# Allegro board PRISON_GOD_SCH_V221_EP_VIAS_CHANGE.brd
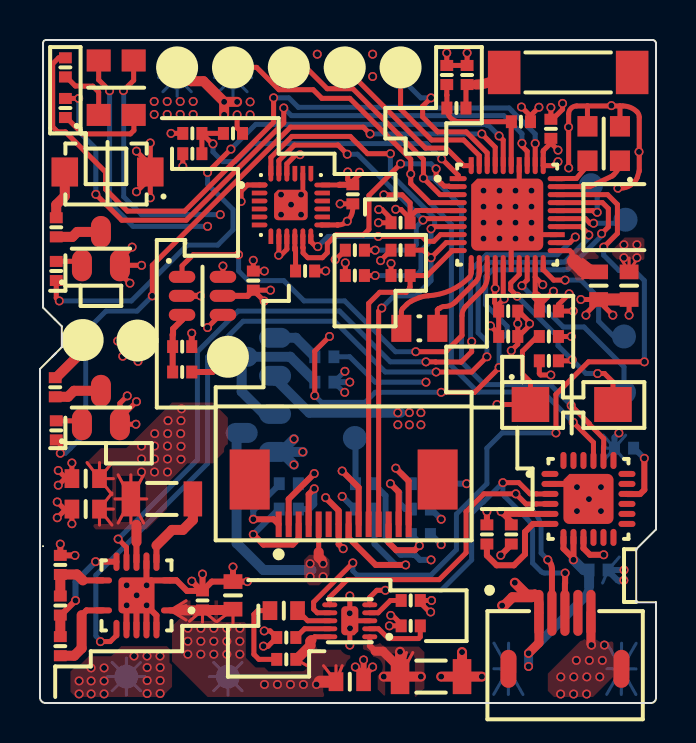
[diagram p0: board, top side]
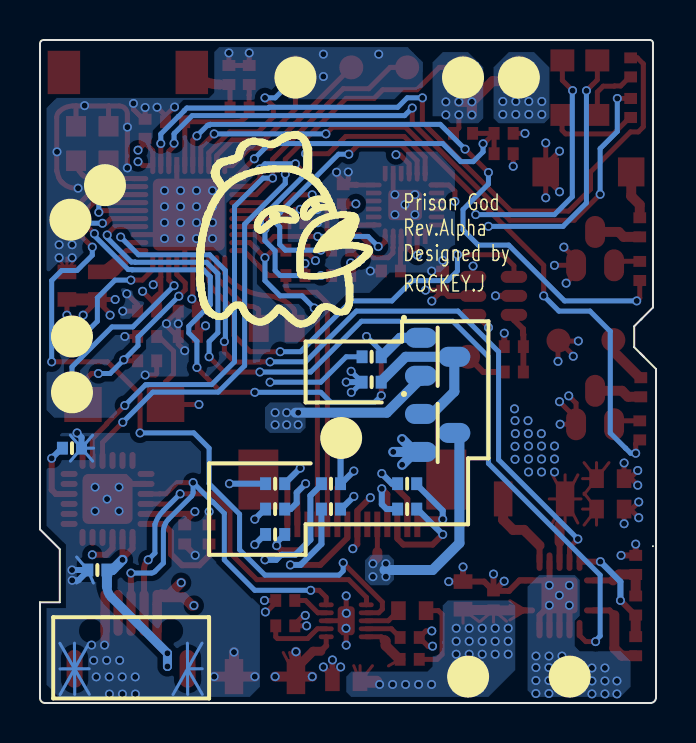
[diagram p1: board, bottom side, seen from below]

Outline 30.81 x 33.17 mm; copper layers: TOP, POWER SOURCE, GND, BOTTOM. Coordinates in mm from the lower left corner of the outline.
Outline path: 0.76,19.18 0.15,19.79 0.15,33.02 arc(0.2,33.13) 0.3,33.17 30.63,33.17 arc(30.76,33.12) 30.81,32.99 30.81,8.69 29.82,7.7 29.82,5.04 30.81,5.04 30.81,0.25 arc(30.74,0.07) 30.56,0 0.28,0 arc(0.08,0.08) 0,0.28 0,16.71 0.79,17.5 ; 0.71,19.23 1.09,18.85 1.09,17.81 0.61,17.32

## Design rules (mm)
constraint set DEFAULT: min track width 0.152

## Placement (name value [footprint] x y rotation side)
ANT  ANTENNA  [ANT700X200-2N]  26.42 31.55 0 top
BAT+  BAT+  [TESTPOINT120]  9.4 1.32 180 bottom
BAT-  BAT-  [TESTPOINT120]  4.32 1.32 180 bottom
C1  100n  [RESC_0402]  7.62 28.5 0 top
C2  2.2p  [RESC_0402]  20.83 29.77 180 top
C3  100n  [RESC_0402]  25.55 28.73 90 top
C4  1.0u  [RESC_0603]  29.46 20.88 90 top
C5  1.0u  [RESC_0402]  25.45 19.61 180 top
C6  100n  [RESC_0402]  25.45 18.34 0 top
C7  1.0u  [RESC_0402]  23.42 19.61 0 top
C8  100n  [RESC_0402]  23.42 18.34 0 top
C9  100n  [RESC_0402]  18.03 24.03 180 top
C10  0-75p  [RESC_0402]  7.11 17.83 0 top
C11  100n  [RESC_0402]  10.67 21.13 270 top
C12  1u  [RESC_0402]  12.45 10.97 180 bottom
C13  4.7u  [RESC_0402]  19.05 10.97 180 bottom
C14  1u  [RESC_0402]  12.45 9.7 180 bottom
C15  2.2u  [RESC_0402]  19.05 9.7 180 bottom
C16  4.7u  [RESC_0402]  16.26 9.7 180 bottom
C17  1u  [RESC_0603]  15.49 1.07 0 top
C18  4.7u  [RESC_0603]  9.65 5.38 90 top
C19  0.1u  [RESC_0402]  8.13 5.13 90 top
C20  10u  [RESC_0603]  2.29 9.7 0 top
C21  10u  [RESC_0603]  2.29 11.23 0 top
C22  100n  [RESC_0402]  13.26 21.62 0 top
C23  10UF  [RESC_1206]  19.56 1.32 180 top
C24  4.7u  [RESC_0402]  29.21 12.75 0 bottom
C25  100n  [RESC_0402]  23.57 8.43 90 top
C26  100n  [RESC_0402]  22.35 8.43 270 top
C27  1.0u  [RESC_0402]  27.94 6.65 180 bottom
C28  100n  [RESC_0402]  15.65 25.45 270 top
CHR_LED  LED  [RESC_0603]  12.19 4.62 180 top
DA_RES  BUTTON  [BUTTON300X400X200-2N]  26.59 14.94 0 top
INTA  INTA  [TESTPOINT120]  29.21 15.54 180 bottom
INTB  INTB  [TESTPOINT120]  29.21 18.34 180 bottom
INTC  INTC  [TESTPOINT120]  18.03 31.8 0 top
INTD  INTD  [TESTPOINT120]  15.24 31.8 0 top
J_GND  GND  [TESTPOINT120]  9.65 31.29 180 bottom
J_VCC  J_VCC  [TESTPOINT120]  6.86 31.29 180 bottom
L1  DNP  [RESC_0402]  21.36 31.42 90 top
L2  7.5n  [RESC_0402]  20.35 31.42 90 top
L3  3.9n  [RESC_0402]  24.05 29.08 0 top
L4  2.2u  [RESC_0603]  27.94 20.88 270 top
L5  4.7u  [RESC_1206]  6.1 10.21 180 top
LED  RED_GREEN  [RGB_COM_A_3528-4N]  3.81 30.78 90 top
NOREF  -  []  31.75 0.05 90 top
NOREF#2  -  []  0.25 33.55 0 top
PAD  PAD  [TESTPOINT120]  9.4 17.32 0 top
Q1  SI2302DS  [SOT95P237X112-3N]  3.05 22.73 90 top
Q2  SI2302DS  [SOT95P237X112-3N]  3.05 14.78 90 top
Q3  Si2301BDS  [SOT95P237X112-3N]  10.92 13.51 180 bottom
Q4  SI2302DS  [SOT95P237X112-3N]  10.92 17.32 180 bottom
R1  10k  [RESC_0402]  9.65 28.5 0 top
R2  10k  [RESC_0402]  7.62 27.48 0 top
R3  10k  [RESC_0402]  18.03 21.39 180 top
R4  10k  [RESC_0402]  18.03 22.66 180 top
R5  10k  [RESC_0402]  15.75 22.66 0 top
R6  10k  [RESC_0402]  15.75 21.39 0 top
R7  10k  [RESC_0402]  25.45 17.12 0 top
R8  100  [RESC_0402]  0.81 23.8 270 top
R9  100  [RESC_0402]  0.76 15.8 270 top
R10  100  [RESC_0402]  1.27 31.8 90 top
R11  100  [RESC_0402]  1.27 29.77 90 top
R12  100  [RESC_0402]  0.81 21.62 90 top
R13  100  [RESC_0402]  0.81 13.64 90 top
R14  1-10k  [RESC_0402]  7.11 16.56 180 top
R15  47k  [RESC_0402]  14.22 16.05 180 bottom
R16  47k  [RESC_0402]  14.22 17.32 180 bottom
R17  10k  [RESC_0402]  16.26 10.97 180 bottom
R18  560k  [RESC_0402]  19.05 8.43 180 bottom
R19  500  [RESC_0402]  18.54 3.86 0 top
R20  250  [RESC_0402]  18.54 5.13 0 top
R21  10k  [RESC_0402]  12.32 3.28 180 top
R22  1.5k  [RESC_0402]  12.32 2.18 0 top
R23  158k  [RESC_0402]  1.02 2.84 90 top
R24  90k  [RESC_0402]  1.02 6.91 90 top
R25  15k  [RESC_0402]  1.02 4.88 90 top
RES  RES  [TESTPOINT120]  15.75 13.26 180 bottom
RXD  RX  [TESTPOINT120]  9.65 31.8 0 top
SOUNDER  R  [DET402_450X300-2N]  3.38 26.57 180 top
SWCLK  SWCLK  [TESTPOINT120]  27.56 25.91 180 bottom
SWDIO  SWDIO  [TESTPOINT120]  29.29 24.18 180 bottom
TXD  TX  [TESTPOINT120]  12.45 31.8 0 top
U1  DA14583_QFN40  [QFN40P500X500X80-41N]  23.37 24.43 0 top
U2  ASC0111B  [SOT95P237X292-6N]  8.13 20.37 0 top
U3  OLED_DIS_64_32  [FPC14N_1280X670X200-16N]  11.94 8.94 180 top
U4  BQ24050  [SON40P200X200X80-11N]  15.49 4.11 180 top
U5  TPS62736_PVQFN14  [QFN14P350X350X80-15N]  4.83 5.38 180 top
U6  MPU9250  [QFN24P300X300X100-25N_NEW]  12.55 24.92 0 top
U7  CP2104_QFN24  [QFN24P400X400X80-25N]  27.43 10.21 0 top
U_GND  GND  [TESTPOINT120]  6.86 31.8 0 top
USB  MICRO USB  [MICROUSB_NEW]  22.56 -0.89 0 top
VM+  VM+  [TESTPOINT120]  4.88 18.14 0 top
VM-  VM-  [TESTPOINT120]  2.13 18.16 0 top
VPP  VPP  [TESTPOINT120]  18.03 31.29 180 bottom
Y1  16MHZ  [OSCCC200X250X90-4N]  28.19 27.99 180 top
Y2  32KHZ  [OSCCC200X120X60-2N]  18.97 18.75 0 top

## Library data of the parts
ANT = ANTENNA_0
BAT+ BAT- INTA INTB INTC INTD J_GND J_VCC PAD RES RXD SWCLK SWDIO TXD U_GND VM+ VM- VPP = TEST POINT
C1-C22 C24-C28 = CAP NP
C23 = CAP
CHR_LED = LED
DA_RES = SW PUSHBUTTON
L1-L5 = INDUCTOR
LED = LED BI-COLOUR_0
Q1 Q2 Q4 = MOSFET_I_EN_GSD: room: motor
Q3 = Si2301BDS_0
R1-R25 SOUNDER = R
U1 = DA14583_QFN40
U2 = ASC0111B_0
U3 = OLED_DIS_64_0
U4 = BQ24050
U5 = TPS62736_PVQFN14_2
U6 = MPU9250_1
U7 = CP2104_QFN24_0
USB = MICROUSB_1
Y1 = CRYSTAL14
Y2 = CRYSTAL

## Footprints (pads in the part's own frame, mm; a bottom-side part is the same pattern mirrored in y, then rotated)
ANT700X200-2N
  rect 1.625x2.17 smd: 1(-3.2,0) 2(3.2,0)
BUTTON300X400X200-2N
  rect 1.875x1.75 smd: 1(-2.062,0) 2(2.062,0)
DET402_450X300-2N
  rect 1.325x1.45 smd: 1(-2.138,0) 2(2.138,0)
FPC14N_1280X670X200-16N
  rect 0.3x1.28 smd: 1(0,0) 2(-0.5,0) 3(-1,0) 4(-1.5,0) 5(-2,0) 6(-2.5,0) 7(-3,0) 8(-3.5,0) 9(-4,0) 10(-4.5,0) 11(-5,0) 12(-5.5,0) 13(-6,0) 14(-6.5,0)
  rect 2x3 smd: M1(-7.95,-2.24) M2(1.45,-2.24)
MICROUSB_NEW
  round 0 hole 0.6: (1.7,4.5) (5.7,4.5)
  oval 0.46x2.3 smd: 1(2.4,5.4) 2(3.05,5.4) 3(3.7,5.4) 4(4.35,5.4) 5(5,5.4)
  oval 1.9x0.8 smd rot 89.7: 6(6.525,2.6) 7(0.875,2.6)
OSCCC200X120X60-2N
  rect 1x1.35 smd: 1(-0.9,0) 2(0.9,0)
OSCCC200X250X90-4N
  rect 1x1.025 smd: 1(-0.812,0.863) 2(-0.812,-0.863) 3(0.812,-0.863) 4(0.812,0.863)
QFN14P350X350X80-15N
  oval 0.925x0.3 smd: 1(-1.688,0.75) 7(1.688,0.75) 8(1.688,-0.75) 14(-1.688,-0.75)
  oval 0.3x0.925 smd: 2(-1,1.688) 3(-0.5,1.688) 4(0,1.688) 5(0.5,1.688) 6(1,1.688) 9(1,-1.688) 10(0.5,-1.688) 11(0,-1.688) 12(-0.5,-1.688) 13(-1,-1.688)
  custom 1.8x1.8 smd: 15(0,0)
QFN24P300X300X100-25N_NEW
  custom 0.78x0.235 smd: 1(-1.563,1) 2(-1.563,0.6) 3(-1.563,0.2) 4(-1.563,-0.2) 5(-1.563,-0.6) 6(-1.563,-1) 13(1.563,-1) 14(1.563,-0.6) 15(1.563,-0.2) 16(1.563,0.2) 17(1.563,0.6) 18(1.563,1)
  custom 0.235x0.78 smd: 7(-1,-1.563) 8(-0.6,-1.563) 9(-0.2,-1.563) 10(0.2,-1.563) 11(0.6,-1.563) 12(1,-1.563) 19(1,1.563) 20(0.6,1.563) 21(0.2,1.563) 22(-0.2,1.563) 23(-0.6,1.563) 24(-1,1.563)
  custom 1.68x1.52 smd: 25(0,0)
QFN24P400X400X80-25N
  oval 0.85x0.3 smd: 1(-1.925,1.25) 2(-1.925,0.75) 3(-1.925,0.25) 4(-1.925,-0.25) 5(-1.925,-0.75) 6(-1.925,-1.25) 13(1.925,-1.25) 14(1.925,-0.75) 15(1.925,-0.25) 16(1.925,0.25) 17(1.925,0.75) 18(1.925,1.25)
  oval 0.3x0.85 smd: 7(-1.25,-1.925) 8(-0.75,-1.925) 9(-0.25,-1.925) 10(0.25,-1.925) 11(0.75,-1.925) 12(1.25,-1.925) 19(1.25,1.925) 20(0.75,1.925) 21(0.25,1.925) 22(-0.25,1.925) 23(-0.75,1.925) 24(-1.25,1.925)
  custom 2.5x2.5 smd: 25(0,0)
QFN40P500X500X80-41N
  custom 0.85x0.25 smd: 1(-2.45,1.8) 2(-2.45,1.4) 3(-2.45,1) 4(-2.45,0.6) 5(-2.45,0.2) 6(-2.45,-0.2) 7(-2.45,-0.6) 8(-2.45,-1) 9(-2.45,-1.4) 10(-2.45,-1.8) 21(2.45,-1.8) 22(2.45,-1.4) 23(2.45,-1) 24(2.45,-0.6) 25(2.45,-0.2) 26(2.45,0.2) 27(2.45,0.6) 28(2.45,1) 29(2.45,1.4) 30(2.45,1.8)
  custom 0.25x0.85 smd: 11(-1.8,-2.45) 12(-1.4,-2.45) 13(-1,-2.45) 14(-0.6,-2.45) 15(-0.2,-2.45) 16(0.2,-2.45) 17(0.6,-2.45) 18(1,-2.45) 19(1.4,-2.45) 20(1.8,-2.45) 31(1.8,2.45) 32(1.4,2.45) 33(1,2.45) 34(0.6,2.45) 35(0.2,2.45) 36(-0.2,2.45) 37(-0.6,2.45) 38(-1,2.45) 39(-1.4,2.45) 40(-1.8,2.45)
  custom 3.6x3.6 smd: 41(0,0)
RESC_0402
  rect 0.55x0.64 smd: 1(-0.477,0) 2(0.477,0)
RESC_0603
  rect 0.73x0.94 smd: 1(-0.69,0) 2(0.69,0)
RESC_1206
  rect 0.925x1.75 smd: 1(-1.55,0) 2(1.55,0)
RGB_COM_A_3528-4N
  rect 1.1x1.2 smd: 1(-1.363,0.875) 2(-1.363,-0.875) 3(1.363,-0.875) 4(1.363,0.875)
SON40P200X200X80-11N
  oval 0.75x0.24 smd: 1(-1,0.8) 2(-1,0.4) 3(-1,0) 4(-1,-0.4) 5(-1,-0.8) 6(1,-0.8) 7(1,-0.4) 8(1,0) 9(1,0.4) 10(1,0.8)
  custom 0.85x1.45 smd: 11(0,0)
SOT95P237X112-3N
  oval 1.6x1 smd: 1(-0.835,0.95) 2(-0.835,-0.95) 3(0.835,0)
SOT95P237X292-6N
  oval 1.325x0.6 smd: 1(-1.022,0.95) 2(-1.022,0) 3(-1.022,-0.95) 4(1.022,-0.95) 5(1.022,0) 6(1.022,0.95)
TESTPOINT120
  round 1.2 smd: 1(0,0)

## Nets
GND: BAT-.1 C1.1 C3.2 C4.2 C5.1 C6.2 C7.2 C8.2 C9.2 C10.2 C11.1 C13.1 C15.1 C16.2 C17.2 C18.2 C19.2 C20.1 C21.1 C22.2 C23.1 C24.1 C25.1 C26.1 C27.1 C28.1 J_GND.1 L1.2 L2.2 L3.2 Q1.2(S) Q2.2(S) Q4.2(S) R1.2 R7.1 R16.1 R18.1 R19.1 R20.2 R21.2 R24.2 U1.16 U1.23 U1.34 U1.41 U2.2 U2.4 U2.6 U3.7(VSS) U4.3(VSS) U4.11 U5.2 U5.3 U5.4 U5.5 U5.12(VSS) U5.14 U5.15 U6.18 U6.20 U6.25 U7.2 U7.25 U_GND.1 USB.5 USB.6 USB.7 Y1.2 Y1.3
VBAT: BAT+.1 C17.1 C18.1 C19.1 J_VCC.1 Q3.2(S) R2.1 R15.1 R22.2 SOUNDER.1 U4.10 U5.1 VM+.1
VBAT_AD: C1.2 R1.1 R2.2 U1.1
VBUS: C23.2 C27.2 U4.1 U7.7 U7.8 USB.1(VBUS)
VCC_3V: C6.1 C7.1 C8.1 C9.1 C11.2 C16.1 C20.2 C21.2 C25.2 C28.2 DA_RES.1 L5.2 LED.3 LED.4 R3.2 R4.2 R5.1 R6.1 R17.1 U1.5 U1.14 U1.15 U2.5(VDD) U3.8 U5.11 U6.1 U6.8(VDDIO) U6.9 U6.13 U6.22 U7.5 U7.9
VIN_OK: U1.22 U5.10
VIN_OK_SET: U1.24 U5.6
CHR_SET: U1.28 U4.7
D+: U4.5 U7.3 USB.3
D-: U4.6 U7.4 USB.2
DA_RST: DA_RES.2 R7.2 U1.17
I2C_SCL_1: R4.1 U1.9 U3.11
I2C_SCL_2: R5.2 U1.6 U6.23
I2C_SDA_1: R3.1 U1.10 U3.10
I2C_SDA_2: R6.2 U1.7 U6.24
INTA: INTA.1 U1.18
INTB: INTB.1 U1.20
INTC: INTC.1 U1.39
INTD: INTD.1 U1.40
LED1: R10.2 U1.32
LED2: R11.2 U1.33
MOTOR: R13.1 U1.37
MPU_FSYNC: U1.2 U6.11
MPU_INT: U1.8 U6.12
OLED_RES: R17.2 RES.1 U3.9
OLED_VBAT: Q3.3 U3.5
OLED_VBAT_SW: Q4.1 R16.2 U1.27
SOUNDER: R12.1 U1.36
SWCLK: SWCLK.1 U1.26
SWDIO: SWDIO.1 U1.25
TOUCH: U1.13 U2.1
UART_RX: RXD.1 U1.4 U7.21
UART_TX: TXD.1 U1.3 U7.20
VDCDC: C3.1 C4.1 C5.2 L4.2 U1.19 U1.31
VPP: U1.38 VPP.1
N650552: C2.2 L2.1 L3.1 U1.35
N650846: L4.1 U1.21
N657737: U1.11 Y2.1
N657743: U1.12(XTAL32KP) Y2.2
N658494: U1.29 Y1.1
N680797: ANT.1 C2.1 L1.1
N748992: R19.2 U4.2
N749044: R20.1 U4.4
N749072: R21.1 U4.9
N749104: CHR_LED.1(CATHODE) U4.8
N749108: CHR_LED.2 R22.1
N749358: L5.1 U5.13
N749416: R24.1 R25.2 U5.8
N749488: R23.2 R25.1 U5.9
N750591: C22.1 U6.10
N751124: R8.1 SOUNDER.2
N751136: R9.1 VM-.1
N751236: Q1.3 R8.2
N751248: Q2.3 R9.2
N751256: Q1.1 R12.2
N751260: Q2.1 R13.2
N752175: C12.2 U3.1
N752329: Q3.1 Q4.3 R15.2
N752341: C12.1 U3.2
N752385: C14.2 U3.3
N752391: C14.1 U3.4
N752429: R18.2 U3.12
N752435: C15.2 U3.13
N752441: C13.2 U3.14
N753230: LED.1 R10.1
N753234: LED.2(YG_C) R11.1
N753932: C24.2 U7.16(VPP)
N754493: C10.1 R14.2 U2.3
N766501: PAD.1 R14.1
N768010: C26.2 U7.6
N788503: U1.30 Y1.4
N7492626: R23.1 U5.7

Pads without a net: ANT 2; U3 6 M1 M2; U6 2 3 4 5 6 7 14 15 16 17 19 21; U7 1 10 11 12 13 14 15 17 18 19 22 23 24; USB 4

## Via types
v1: diameter 0.45, hole 0.3, TOP to BOTTOM, 334 vias

## Routing (per net, layer and track width the routed paths; a pad name or vN(x,y) marks a point on that pad's centre or on a via; arc(x,y) is an arc through that point)
GND: length 163.2
  TOP w0.152: C4.2 29.46,22.26 ; C4.2 29.86,22.23 ; C4.2 29.06,22.23
  TOP w0.24: U6.20 13.15,25.52 ; 14.98,25.92 U6.18
  TOP w0.25: 27.38,29.87 29.01,29.87 ; 27.38,29.87 26.84,29.87 arc(26.56,29.75) 26.44,29.47 v1(26.44,26.77) ; 27.38,29.87 arc(27.38,29.87) 27.38,29.87 Y1.3 ; 29.01,29.87 29.15,29.87 arc(29.53,29.79) 29.86,29.57 arc(29.94,29.45) 29.97,29.31 29.97,26.66 arc(29.97,26.62) 29.96,26.58 29.87,26.29 arc(29.83,26.19) 29.76,26.1 29.69,26.04 arc(29.38,25.83) 29.02,25.76 v1(28.91,25.76) ; 29.01,29.87 arc(29.01,29.87) 29.01,29.87 Y1.2 ; C7.2 23.88,19.63 ; C7.2 23.94,19.61 24.49,19.06 v1(24.49,18.97) 24.49,18.89 23.94,18.34 C8.2 ; C7.2 v1(23.9,18.97) C8.2 ; C7.2 23.88,19.59 ; 1.32,11.23 1.24,11.23 v1(0.91,10.9) ; 1.32,11.23 v1(0.91,11.63) ; 1.32,11.23 C21.1 v1(1.6,12.01) ; v1(14.29,21.62) C22.2 ; 24.53,29.37 v1(24.08,29.82) ; 24.53,29.37 24.53,29.38 v1(24.96,29.81) ; 24.53,29.37 L3.2 ; v1(4.5,21.01) 4,21.5 Q1.2 ; v1(8.38,18.79) 9.01,19.42 U2.4 ; v1(15.5,5.36) 15.5,4.12 U4.11 ; v1(26.14,30) 26.14,29.7 25.64,29.2 C3.2 v1(25.55,29.79) ; Q1.2 4,22.2 v1(4.61,22.81) ; Q1.2 v1(5.08,21.9) ; C6.2 v1(26.57,18.34) ; v1(16.93,24.03) C9.2 17.56,24.24 17.11,24.69 v1(16.94,24.69) ; U1.16 23.57,24.23 ; 23.57,24.23 U1.41 23.97,25.03 U1.34 ; 23.57,24.23 24.37,23.43 U1.23 ; U2.6 v1(9.15,21.86) ; v1(11.22,21.61) C11.1 v1(10.67,22.15) ; v1(0.86,10.06) 1.22,9.7 1.3,9.7 ; v1(19.58,5.13) R20.2 19.02,5.02 19.48,4.56 v1(19.54,4.56) ; v1(20.35,32.52) L2.2 L1.2 v1(21.36,32.52) ; v1(1.6,8.97) C20.1 1.3,9.7 ; v1(15.98,26.56) 15.98,26.44 15.65,26.11 C28.1 15.39,26.18 v1(15.39,26.57) ; v1(15.5,2.9) 15.5,4.11 U4.11 ; 1.3,9.7 v1(0.86,9.27) ; C8.2 23.88,18.32 ; C8.2 23.9,17.95 v1(23.57,17.63) ; C8.2 23.88,18.36 ; U4.11 U4.3 ; v1(17.48,3.86) R19.1 18.06,3.95 17.63,4.38 v1(17.54,4.38) ; 13.15,25.52 U6.25 ; v1(11.18,2.84) 11.41,2.84 R21.2 11.51,3.61 v1(11.21,3.61) ; C1.1 v1(6.55,28.5) ; 4,14.25 Q2.2 v1(4.8,13.95) ; 4,14.25 v1(4.83,15.08) ; 4,14.25 4,15 v1(4.37,15.37) ; 10.13,28.54 R1.2 9.86,28.77 v1(9.86,29.43) ; R7.1 24.97,16.48 25.04,16.41 v1(25.55,16.41) ; v1(26.67,19.61) C5.1 25.93,19.93 v1(26.47,20.47)
  TOP w0.3: U5.15 4.33,4.88 U5.5 ; U5.15 5.33,5.88 ; U5.15 5.33,4.88 ; U5.15 U5.4 ; C18.2 8.59,6.07 C19.2 ; C18.2 v1(10.37,6.07) ; C18.2 v1(9.65,6.81) ; 16.18,1.39 v1(15.77,1.8) ; 16.18,1.39 v1(16.18,2.15) ; 16.18,1.39 16.18,1.35 ; 8.08,5.61 C19.2 ; 8.08,5.61 v1(7.59,6.1) ; 8.08,5.61 7.35,5.61 6.83,6.13 U5.14 5.58,6.13 5.33,5.88 ; C19.2 v1(8.13,6.45) ; U5.3 5.33,4.88 ; 5.33,4.88 5.83,4.38 U5.2 ; v1(14.29,10.27) 14.94,9.62 U3.7 14.94,7.95 v1(15.16,7.72) ; v1(23.05,7.39) 23.57,7.92 C25.1 ; 5.33,5.88 U5.12 ; U7.2 26.68,10.96 U7.25 ; C17.2 16.18,1.35 ; 16.18,1.35 v1(16.64,1.8) ; C28.1 14.99,25.93 14.98,25.92 ; v1(1.75,7.39) R24.2 v1(1.02,7.95) ; C10.2 v1(7.59,18.5) ; C26.1 v1(22.35,9.58) ; U2.2 v1(8.03,20.37)
  TOP w0.45: v1(27.58,2.9) 27.56,2.96 USB.5
  TOP w0.5: v1(20.07,1.32) C23.1 ; C23.1 v1(21.11,2.55) ; C23.1 v1(22.1,1.32) ; U_GND.1 7.55,31.11 8.18,31.11 v1(9.21,30.08) ; v1(9.21,30.08) v1(9.86,30.08) ; v1(9.21,30.08) v1(9.21,29.43)
  BOTTOM w0.152: J_GND.1 10.58,31.29 ; J_GND.1 10.36,32 ; J_GND.1 8.94,30.58 ; J_GND.1 8.72,31.29 ; J_GND.1 8.94,32 ; J_GND.1 9.65,30.36 ; J_GND.1 10.36,30.58 ; J_GND.1 9.65,32.22 ; 3.61,2.03 BAT-.1 ; BAT-.1 5.03,2.03 ; BAT-.1 4.32,0.39 ; BAT-.1 5.03,0.61 ; BAT-.1 4.32,2.25 ; BAT-.1 3.61,0.61 ; BAT-.1 3.39,1.32 ; BAT-.1 5.25,1.32 ; USB.6 29.8,0.43 ; USB.6 28.35,1.71 ; USB.6 28.36,3 ; USB.6 29.81,1.71 ; USB.6 29.82,2.99 ; USB.6 29.09,2.99 ; USB.6 28.34,0.43 ; USB.6 29.07,0.43 ; C27.1 28.98,7.31 ; C27.1 28.98,6 ; C27.1 28.14,6 ; 28.17,12.1 C24.1 ; C24.1 29.29,13.4 ; C24.1 28.13,12.75 ; C24.1 29.29,12.1 ; C24.1 28.17,13.4 ; USB.7 24.15,0.43 ; USB.7 23.42,0.43 ; USB.7 22.71,3 ; USB.7 22.69,0.43 ; USB.7 22.7,1.71 ; USB.7 23.44,2.99
  BOTTOM w0.25: R16.1 15.49,17.32 16.76,16.05 v1(19.3,16.05)
  BOTTOM w0.3: C13.1 v1(21.34,10.97) ; R18.1 19.56,8.43 v1(20.07,7.92) ; 28.73,12.71 C24.1 28.73,13.29 v1(28.96,13.51) ; C16.2 15.75,9.7 v1(15.11,10.34) ; v1(20.07,9.19) 19.56,9.7 C15.1 ; v1(29.2,6.14) 28.89,6.14 28.42,6.61 C27.1 v1(29.21,6.65)
  BOTTOM w0.5: 11.76,16.23 13.46,14.53 18.03,14.53 ; 11.76,16.23 Q4.2 ; 11.76,16.23 11.76,16.13
  vias: v1(1.96,1.11) v1(1.96,0.46) v1(2.56,1.76) v1(2.56,1.11) v1(2.56,0.46) v1(3.21,1.76) v1(3.21,1.11) v1(3.21,0.46) v1(4.34,5.89) v1(4.34,4.89) v1(4.7,2.35) v1(4.84,5.39) v1(5.34,5.89) v1(5.34,4.89) v1(5.35,2.35) v1(5.36,1.78) v1(5.36,1.13) v1(5.36,0.48) v1(6,2.35) v1(6.01,1.78) v1(6.01,1.13) v1(6.01,0.48) v1(10.51,30.08) v1(10.51,29.43) v1(12.06,25.43) v1(12.06,24.43) v1(12.56,24.93) v1(13.06,25.43) v1(13.06,24.43) v1(13.87,32.46) v1(15.49,4.49) v1(15.5,3.74) v1(16.64,32.46) v1(16.64,31.34) v1(17.9,14.53) v1(17.9,13.92) v1(18.47,14.53) v1(18.47,13.92) v1(19.05,14.53) v1(19.05,13.92) v1(22.18,25.64) v1(22.18,24.84) v1(22.18,24.04) v1(22.18,23.24) v1(22.98,25.64) v1(22.98,24.84) v1(22.98,24.04) v1(22.98,23.24) v1(23.78,25.64) v1(23.78,24.84) v1(23.78,24.04) v1(23.78,23.24) v1(24.58,25.64) v1(24.58,24.84) v1(24.58,24.04) v1(24.58,23.24) v1(26.05,1.31) v1(26.04,0.45) v1(26.44,28.81) v1(26.7,1.31) v1(26.69,0.45) v1(26.86,10.8) v1(26.86,9.6) v1(26.82,2.13) v1(27.35,1.31) v1(27.34,0.45) v1(27.46,10.2) v1(27.47,2.13) v1(28,1.31) v1(28.06,10.8) v1(28.06,9.6) v1(28.12,2.13) v1(28.23,2.9) v1(28.58,29.89) v1(29.2,22.93) v1(29.2,22.28) v1(29.85,22.93) v1(29.85,22.28) v1(29.96,27.58)
VBAT: length 48.7
  TOP w0.152: 8.85,4.07 C18.1 ; C18.1 8.85,4.69 ; C18.1 9.65,4 ; C17.1 15.11,1.87 ; C17.1 14.8,1.87 ; C17.1 14.18,1.87 ; R22.2 13.36,2.83 ; R22.2 13.38,1.86 ; R22.2 13.38,2.51 ; U5.1 7.31,4.88 ; U5.1 7.31,4.15 ; U5.1 7.31,5.12 ; 8.13,4.05 C19.1 ; C19.1 7.48,4.65 ; C19.1 7.48,4.09 ; C19.1 8.78,4.09
  TOP w0.25: 13.58,3.15 13.74,3.31 U4.10 ; 5.52,26.92 v1(5.52,28.02) ; 5.52,26.92 SOUNDER.1 5.52,26.27 ; 5.52,26.92 v1(4.83,27.61) ; 5.52,26.27 v1(4.83,25.58) ; 5.52,26.27 v1(5.52,25.28) ; 4.85,18.11 4.14,17.4 v1(4.14,17.35) ; 4.85,18.11 VM+.1 4.9,18.11 v1(4.9,17.09) ; 4.85,18.11 v1(3.89,18.11) ; R2.1 v1(7.14,26.85)
  TOP w0.3: U5.1 7.1,4.63
  TOP w0.5: 7.1,4.63 8.11,4.63 C19.1 9.61,4.65 C18.1 ; R22.2 12.83,2.18 13.52,2.88 13.52,3.1 13.58,3.15
  TOP w0.6: C17.1 13.99,1.07
  BOTTOM w0.152: 6.86,30.36 J_VCC.1 ; J_VCC.1 6.15,32 ; J_VCC.1 7.79,31.29 ; J_VCC.1 6.15,30.58 ; J_VCC.1 7.57,32 ; J_VCC.1 6.86,32.22 ; J_VCC.1 7.57,30.58 ; J_VCC.1 5.93,31.29 ; BAT+.1 10.33,1.32 ; BAT+.1 10.11,0.61 ; BAT+.1 9.4,0.39 ; BAT+.1 8.69,2.03 ; BAT+.1 10.11,2.03 ; BAT+.1 8.69,0.61 ; BAT+.1 8.47,1.32 ; BAT+.1 9.4,2.25
  BOTTOM w0.25: 15.21,15.54 R15.1 ; 14.7,16.06 15.24,16.6 v1(15.25,16.6)
  BOTTOM w0.3: v1(15.24,15.54) 15.21,15.54 ; v1(15.49,16.06) 14.7,16.06 R15.1
  BOTTOM w0.5: Q3.2 12.06,12.56 ; 12.06,12.56 v1(12.7,11.92) ; 12.06,12.56 v1(12.7,13.21) ; 12.06,12.56 v1(13.14,12.56)
  vias: v1(5.71,30.1) v1(5.71,29.45) v1(6.36,30.1) v1(6.36,29.45) v1(7.01,30.1) v1(7.01,29.45) v1(7.39,3.74) v1(7.39,3.09) v1(7.39,2.44) v1(7.66,30.1) v1(7.66,29.45) v1(8.04,3.74) v1(8.04,3.09) v1(8.04,2.44) v1(8.69,3.74) v1(8.69,3.09) v1(8.69,2.44) v1(9.34,3.74) v1(9.34,3.09) v1(9.34,2.44) v1(9.99,3.74) v1(9.99,3.09) v1(9.99,2.44) v1(11.23,0.93) v1(11.88,0.93) v1(12.53,0.93) v1(13.18,0.93) v1(13.83,0.93)
VBAT_AD: length 16.9
  TOP w0.25: v1(20.09,27.23) 20.92,26.4 U1.1 ; C1.2 8.62,27.98 v1(8.65,27.98) ; C1.2 R2.2 ; C1.2 R1.1
  BOTTOM w0.25: v1(20.09,27.23) 19.33,27.99 10.67,27.99 9.76,27.09 9.14,27.09 8.65,27.57 v1(8.65,27.98)
VBUS: length 25.3
  TOP w0.152: C23.2 18.65,2.53 ; C23.2 18.33,2.53 ; C23.2 17.37,2.53
  TOP w0.25: U4.1 16.49,2.86
  TOP w0.3: U7.8 26.68,7.23 ; 26.68,7.23 v1(26.68,7.16) ; 26.68,7.23 26.18,7.73 U7.7 ; 16.49,2.86 16.76,2.59
  TOP w0.45: 24.32,5.45 24.75,5.45 ; 24.75,5.45 24.59,5.29 ; 24.75,5.45 arc(24.9,5.23) 24.96,4.96 USB.1 24.96,3.01 v1(24.44,2.49) ; 18.01,1.73 17.15,2.59 16.76,2.59
  TOP w0.5: v1(23.11,4.88) 23.21,4.88 23.63,5.29 24.59,5.29 ; C23.2 v1(17.19,1.32) ; C23.2 v1(18.01,2.56) ; C23.2 v1(19.05,1.32) ; v1(23.75,6.02) 24.32,5.45
  BOTTOM w0.45: v1(24.44,1.83) v1(24.44,2.49) 27.24,5.29 arc(27.4,5.54) 27.46,5.83
  BOTTOM w0.5: 27.46,5.83 C27.2 27.19,6.65 v1(26.68,7.16)
VCC_3V: length 95.5
  TOP w0.152: 3.91,11.42 L5.2 ; L5.2 5.18,9.01 ; L5.2 5.18,11.42 ; L5.2 5.34,10.21 ; L5.2 3.75,10.21 ; L5.2 4.55,11.42 ; L5.2 3.91,9.01 ; L5.2 4.55,9.01 ; C21.2 2.98,12.03 ; C21.2 3.67,11.23 ; C21.2 3.6,12.03 ; C21.2 3.6,10.43 ; C21.2 2.35,12.03 ; C20.2 3.6,10.5 ; C20.2 2.98,8.9 ; C20.2 3.67,9.7 ; C20.2 3.6,8.9
  TOP w0.25: C6.1 24.87,18.34 24.82,18.29 ; 24.82,18.34 24.82,18.29 ; 24.82,18.29 24.13,17.6 24.13,16.46 24.53,16.06 DA_RES.1 v1(22.86,14.94) ; R5.1 14.8,22.18 v1(14.76,22.18) ; v1(15.01,24.97) C28.2 15.65,24.78 arc(15.57,24.41) v1(15.37,24.1) arc(15.16,23.97) 14.92,23.92 U6.13 14.05,23.92 ; 22.94,18.46 v1(22.53,18.87) ; 22.94,18.46 C8.1 ; 22.94,18.46 C7.1 ; R3.2 v1(17.56,21.99) ; v1(13,27.43) 12.8,27.43 12.35,26.98 U6.22 12.35,26.42 ; 22.94,19.82 22.94,19.94 v1(23.22,20.22) 23.17,20.27 U1.15 ; 22.94,19.82 22.74,20.02 22.74,20.71 v1(22.77,20.74) U1.14 ; 22.94,19.82 C7.1 ; 18.51,24.22 18.57,24.27 18.57,24.38 18.82,24.63 18.96,24.63 18.96,24.64 19.36,24.64 19.36,24.63 U1.5 ; 18.51,24.22 18.51,24.31 ; 18.51,24.22 C9.1 ; 10.71,20.66 v1(11.53,20.66) ; 10.71,20.66 C11.2 ; 10.71,20.66 10.88,20.49 10.88,20.45 v1(11.21,20.11) ; 22.92,19.63 C7.1 ; v1(17.2,25.43) 18.11,25.43 18.51,25.02 18.51,24.31 ; v1(17.79,24.7) 17.8,24.69 18.06,24.69 18.44,24.31 18.51,24.31 ; R6.1 v1(15.27,22.02) ; v1(4.17,30.64) 4.69,31.15 LED.3 ; 11.95,23.42 U6.8 11.95,22.41 v1(11.94,22.4) 12.05,22.4 12.35,22.7 U6.9 12.35,23.42 ; LED.4 2.94,31.18 v1(3.48,30.63) ; R4.2 v1(17.03,22.13) ; v1(10.06,25.1) 10.06,25.6 10.37,25.92 U6.1 11.25,25.92
  TOP w0.3: 23.18,9.46 24.01,9.46 24.01,9.46 U7.5 ; 23.18,9.46 v1(23.06,9.58) ; 23.18,9.46 23.57,9.07 C25.2 ; v1(18.29,6.91) 16.79,6.91 15.44,8.26 U3.8 ; v1(28.19,7.42) 27.51,7.42 27.18,7.74 U7.9 ; C11.2 10.38,20.37 U2.5 ; 4.83,8.05 U5.11
  TOP w0.5: 4.83,8.92 4.83,8.05
  BOTTOM w0.25: v1(3.48,30.63) 3.48,25.02 4.65,23.85 v1(8.38,23.85) ; v1(9.02,24.43) 5.08,24.43 4.19,25.33 4.19,30.63 v1(4.17,30.64)
  BOTTOM w0.3: R17.1 16.73,10.93 17.29,10.38 17.29,8.17 18.03,7.42 18.69,7.42 18.7,7.41 18.75,7.41 19,7.16 v1(19.56,7.16) ; v1(18.29,6.91) 17.79,6.91 17.76,6.93 17.75,6.93 16.73,7.96 C16.1
  vias: v1(5.08,12.86) v1(5.08,12.21) v1(5.08,11.56) v1(5.74,13.48) v1(5.73,12.86) v1(5.73,12.21) v1(5.73,11.56) v1(6.4,14.13) v1(6.39,13.48) v1(6.38,12.86) v1(6.38,12.21) v1(6.38,11.56) v1(7.08,14.72) v1(7.05,14.13) v1(7.04,13.48) v1(7.05,12.84) v1(7.05,12.19)
VIN_OK: length 39.2
  TOP w0.25: U5.10 4.33,7.79 v1(3.91,8.2) ; v1(26.77,23.31) 26.5,23.03 U1.22 ; v1(21.59,18.08) 21.59,17.58 21.08,17.07 21.06,17.07 21.06,17.06 19.79,17.06 19.78,17.07 v1(19.3,17.07)
  BOTTOM w0.25: v1(26.77,23.31) 25.89,22.43 22.32,22.43 21.54,21.64 21.54,18.23 21.59,18.18 v1(21.59,18.08) ; v1(3.91,8.2) 7.87,12.17 7.87,17.58 9.91,19.61 14.99,19.61 17.53,17.07 v1(19.3,17.07)
VIN_OK_SET: length 46.6
  TOP w0.25: U5.6 3.83,3.38 3.51,3.07 v1(3.02,3.07) ; v1(19.81,16.56) 21.59,16.56 v1(22.35,17.32) ; U1.24 27.07,23.83 27.43,23.48 27.43,23.44 v1(27.45,23.41)
  BOTTOM w0.25: v1(27.45,23.41) 27.45,23.27 26.24,22.06 26.06,22.06 26.04,22.05 22.48,22.05 21.91,21.48 21.91,18.52 22.35,18.08 v1(22.35,17.32) ; v1(3.02,3.07) 3.02,3.12 2.79,3.35 2.79,6.4 8.38,11.99 8.38,17.32 10.16,19.1 14.73,19.1 17.27,16.56 v1(19.81,16.56)
CHR_SET: length 39.4
  TOP w0.25: v1(15.65,7.01) 13.69,5.05 13.69,4.7 13.87,4.51 U4.7 ; v1(25.81,13.51) 25.81,15.44 27.43,17.07 v1(30.23,17.07) ; U1.28 28.39,25.43 28.88,24.94 28.88,23.49 v1(28.19,22.81)
  BOTTOM w0.25: v1(30.23,17.07) 30.23,21.14 29.72,21.64 28.96,21.64 28.19,22.4 v1(28.19,22.81) ; v1(25.81,13.51) 23.11,13.51 22.35,12.75 22.35,10.97 20.83,9.45 20.83,7.67 19.56,6.4 15.85,6.4 15.65,6.61 v1(15.65,7.01)
D+: length 21.8
  TOP w0.25: v1(17.27,5.64) 16.85,5.64 16.49,5.29 U4.5 ; v1(23.15,11.02) 23.95,11.02 24.51,10.46 24.83,10.46 24.83,10.46 U7.3
  TOP w0.3: USB.3 26.26,5.99 26.26,6 v1(26.26,6.5)
  BOTTOM w0.25: v1(17.27,5.64) 20.07,5.64 21.59,7.16 21.59,9.49 22.15,10.05 22.18,10.05 v1(23.15,11.02) 23.15,10.55 arc(23.17,10.44) 23.24,10.34 24.39,9.19 arc(24.47,9.09) 24.53,8.98 arc(24.56,8.92) 24.59,8.85 arc(24.63,8.73) 24.64,8.61 24.64,7 25.06,6.58 arc(25.15,6.52) 25.24,6.5 v1(26.26,6.5)
D-: length 21.6
  TOP w0.25: U7.4 24.83,9.96 24.83,9.96 24.31,9.96 v1(23.8,10.46) 22.2,10.46 21.31,9.58 21.31,7.52 19.96,6.17 15.37,6.17 14.48,5.29 14.48,4.93 U4.6
  TOP w0.3: USB.2 25.61,6.7 arc(25.56,6.94) 25.43,7.14 v1(25.4,7.16)
  BOTTOM w0.25: v1(25.4,7.16) 25.06,7.5 25.06,8.93 arc(24.89,9.3) 24.64,9.63 v1(23.8,10.46)
DA_RST: length 10.6
  TOP w0.25: v1(26.62,17.17) 26.57,17.12 R7.2 ; U1.17 23.97,21.44 23.55,21.01 23.55,20.68 v1(23.87,20.35) ; v1(27.89,16.48) 28.23,16.48 28.66,16.06 DA_RES.2
  BOTTOM w0.25: v1(27.89,16.48) 27.3,16.48 v1(26.62,17.17) 25.91,17.88 25.91,18.31 v1(23.87,20.35)
I2C_SCL_1: length 17.9
  TOP w0.25: v1(17.09,19.76) 16.94,19.61 U3.11 ; R4.1 19.18,22.66 v1(19.56,22.28) 20.32,23.03 U1.9
  BOTTOM w0.25: v1(19.56,22.28) 19.56,21.13 18.8,20.37 17.7,20.37 v1(17.09,19.76)
I2C_SCL_2: length 15.7
  TOP w0.25: v1(16.76,22.66) R5.2 ; 11.95,26.42 U6.23 11.95,27.14 12.73,27.91 14.91,27.91 v1(15.37,27.46) ; U1.6 19.23,24.23 v1(19.16,24.16)
  BOTTOM w0.25: v1(16.76,22.66) 18.54,22.66 18.82,22.94 18.82,23.83 v1(19.16,24.16) 18.8,24.52 18.8,24.54 15.88,27.46 v1(15.37,27.46)
I2C_SDA_1: length 17
  TOP w0.25: U3.10 16.44,19.99 16.99,20.55 18.31,20.55 18.49,20.73 18.49,20.79 18.51,20.81 R3.1 19.37,21.39 20.62,22.63 U1.10
I2C_SDA_2: length 19
  TOP w0.25: v1(16.76,21.39) R6.2 ; U1.7 19.67,23.83 v1(19.56,23.72) ; v1(17.53,27.48) 16.38,27.48 15.52,28.35 12.6,28.35 11.55,27.3 U6.24 11.55,26.42
  BOTTOM w0.25: v1(16.76,21.39) 18.8,21.39 19.05,21.64 19.05,22.62 19.56,23.13 v1(19.56,23.72) 19.74,23.9 19.74,24.26 19.34,24.66 19.33,24.66 17.53,26.47 v1(17.53,27.48)
INTA: length 9.3
  TOP w0.25: U1.18 24.37,21.17 24.1,20.9 v1(24.1,20.88)
  BOTTOM w0.25: v1(24.1,20.88) 26.17,18.82 27.21,18.82 29.21,16.81 INTA.1
INTB: length 6.7
  TOP w0.25: v1(26.26,21.16) 25.69,21.16 25.17,21.68 U1.20
  BOTTOM w0.25: v1(26.26,21.16) 27.06,21.16 27.94,20.28 27.94,19.1 28.7,18.34 INTB.1 29.46,18.34
INTC: length 7.5
  TOP w0.25: INTC.1 18.03,29.72 19.58,28.17 21.19,28.17 21.97,27.39 U1.39
INTD: length 8.4
  TOP w0.25: U1.40 21.19,26.88 20.31,27.76 19.28,27.76 INTD.1
LED1: length 35.7
  TOP w0.25: v1(24.77,27.99) U1.32 ; R10.2 0.93,32.28 0.64,31.98 0.64,28.82 0.89,28.57 1.27,28.57 3.28,26.57 3.28,25.7 4.37,24.61 7.24,24.61 11.68,29.06 v1(11.68,30.28)
  BOTTOM w0.25: v1(11.68,30.28) 12.45,30.28 12.92,29.8 19.36,29.8 19.39,29.77 23.47,29.77 23.6,29.63 23.6,29.62 23.88,29.34 23.89,29.34 24.77,28.47 v1(24.77,27.99)
LED2: length 32.7
  TOP w0.25: v1(12.19,29.77) 12.19,29.03 7.32,24.16 4.09,24.16 v1(2.79,25.45) ; R11.2 v1(1.94,30.25) ; U1.33 24.37,27.6 24.1,27.86 v1(24.1,28)
  BOTTOM w0.25: v1(12.19,29.77) 12.57,29.39 23.2,29.39 24.07,28.52 arc(24.08,28.5) 24.1,28.49 arc(24.1,28.48) 24.1,28.48 v1(24.1,28) ; v1(2.79,25.45) 2.79,27.74 1.94,28.6 v1(1.94,30.25)
MOTOR: length 34.5
  TOP w0.25: R13.1 1.02,12.96 v1(1.02,12.5) ; v1(5.62,20.37) 5.62,21.9 12.53,28.81 16.17,28.81 v1(16.51,28.47) ; U1.37 22.77,27.8 v1(22.1,28.47)
  BOTTOM w0.25: v1(22.1,28.47) v1(16.51,28.47) ; v1(1.02,12.5) 1.27,12.5 1.52,12.75 1.53,12.75 2.29,13.51 2.29,18.59 3.3,19.61 4.86,19.61 v1(5.62,20.37)
MPU_FSYNC: length 12.7
  TOP w0.25: U1.2 20.49,25.83 20.46,25.86 20.22,25.86 20.07,26.01 20.05,26.01 19.81,26.24 v1(19.81,26.72) ; v1(18.03,26.97) 16.45,25.39 16.45,23.69 16.18,23.42 14.81,23.42 14.37,22.98 14.37,22.53 14.12,22.28 13.4,22.28 13.16,22.52 13.16,22.78 13.15,22.79 U6.11 13.15,23.42
  BOTTOM w0.25: v1(19.81,26.72) 19.56,26.97 v1(18.03,26.97)
MPU_INT: length 8.3
  TOP w0.25: U1.8 20.03,23.43 19.7,23.1 19.34,23.1 19.1,23.34 v1(16.92,23.34) ; 13.55,23.42 U6.12 13.55,23.08 13.8,22.83 v1(13.89,22.83)
  BOTTOM w0.25: v1(13.89,22.83) 14.4,23.34 v1(16.92,23.34)
OLED_RES: length 6.2
  TOP w0.3: v1(15.11,11.61) 15.94,10.78 U3.9
  BOTTOM w0.3: v1(15.11,11.61) 15.7,11.02 15.78,11.02 ; 15.78,11.02 15.78,13.19 RES.1 ; 15.78,11.02 R17.2
OLED_VBAT: length 11.8
  TOP w0.25: 13.94,7.55 U3.5
  TOP w0.5: 13.94,7.55 13.94,7.3 14.1,7.14
  BOTTOM w0.25: 13.6,6.64 13.58,6.65
  BOTTOM w0.5: 13.58,6.65 11.18,6.65 9.83,8 9.83,13.26 Q3.3
  vias: v1(13.51,6.97) v1(13.51,6.32) v1(14.16,6.97) v1(14.16,6.32)
OLED_VBAT_SW: length 33.1
  TOP w0.25: v1(22.96,16.79) 22.96,16.77 21.74,15.54 v1(20.07,15.54) ; v1(14.48,18.34) 13.74,17.6 v1(13.74,15.38) ; U1.27 28.13,25.03 28.43,24.74 28.43,23.82 v1(28.09,23.48)
  BOTTOM w0.25: v1(13.74,15.38) 14.08,15.04 16.26,15.04 16.76,15.54 v1(20.07,15.54) ; v1(28.09,23.48) 28.09,23.38 26.4,21.69 26.21,21.69 26.2,21.67 22.64,21.67 22.29,21.33 22.29,19.92 23.37,18.85 23.37,18.51 22.96,18.1 v1(22.96,16.79) ; R16.2 13.75,17.61 v1(14.48,18.34)
  BOTTOM w0.5: Q4.1 12.8,18.27 R16.2
SOUNDER: length 32
  TOP w0.25: R12.1 0.81,20.27 v1(0.97,20.12) ; v1(8.38,26.54) v1(9.55,27.71) ; U1.36 23.17,28.17 v1(22.96,28.37)
  BOTTOM w0.25: v1(9.55,27.71) 10.79,28.95 22.3,28.95 22.34,28.91 22.42,28.91 v1(22.96,28.37) ; v1(8.38,26.54) 8.38,25.96 9.65,24.69 9.65,23.67 8.89,22.91 7.37,22.91 4.57,20.12 v1(0.97,20.12)
SWCLK: length 3.6
  TOP w0.25: U1.26 27.66,24.63 27.75,24.55 v1(27.87,24.55)
  BOTTOM w0.25: v1(27.87,24.55) 27.87,25.6 SWCLK.1
SWDIO: length 3.6
  TOP w0.25: U1.25 27.28,24.23 27.51,24 v1(27.69,24)
  BOTTOM w0.25: v1(27.69,24) 29.11,24 SWDIO.1
TOUCH: length 21.7
  TOP w0.25: v1(9.93,22.43) 7.66,22.43 7.11,21.87 U2.1 ; U1.13 22.37,21.31 arc(22.3,20.95) 22.09,20.65 21.3,19.86 arc(21.16,19.64) 21.11,19.38 21.11,18.39 20.29,17.58 v1(18.8,17.58)
  BOTTOM w0.25: v1(18.8,17.58) 17.78,17.58 15.24,20.12 13.21,20.12 12.19,21.13 10.41,21.13 9.93,21.62 v1(9.93,22.43)
UART_RX: length 34.8
  TOP w0.25: v1(26.67,14.05) 27.68,13.03 U7.21 ; U1.4 19.5,25.03 18.54,25.99 v1(18.54,26.47) 18.54,27.2 15.49,30.25 14.1,30.25 13.67,30.68 11.95,30.68 10.83,31.8 RXD.1
  BOTTOM w0.25: v1(26.67,14.05) 25.16,15.55 21.9,15.55 20.57,16.88 20.57,23.96 18.54,25.99 v1(18.54,26.47)
UART_TX: length 31.7
  TOP w0.25: TXD.1 13.3,31.8 14.36,30.73 15.65,30.73 19.18,27.2 v1(19.18,26.26) 20.01,25.43 U1.3 ; v1(26.57,14.88) 27.47,13.99 27.47,13.96 28.19,13.23 28.19,12.82 28.18,12.81 U7.20
  BOTTOM w0.25: v1(26.57,14.88) 25.53,15.92 25.41,15.92 25.4,15.93 22.22,15.93 21.08,17.07 21.08,24.84 19.65,26.26 v1(19.18,26.26)
VDCDC: length 12.1
  TOP w0.25: v1(25.91,27.08) 25.86,27.08 25.66,26.88 U1.31 25.17,27.56 25.17,27.57 25.17,27.64 25.55,28.02 ; 25.55,28.02 v1(25.91,27.66) ; 25.55,28.02 C3.1 ; v1(28.65,19.41) 28.05,20.01 28.05,20.19 ; U1.19 24.77,21.31 ; 24.77,21.31 24.77,20.41 24.82,20.36 ; 24.77,21.31 v1(25.15,20.93) ; v1(27.05,20.19) L4.2 27.94,20.12 27.3,19.48 v1(27.3,19.41) ; v1(29.46,19.41) C4.1 ; 24.97,19.89 v1(25.68,20.6)
  TOP w0.5: 24.82,20.36 24.97,20.2 C5.2
  TOP w0.6: L4.2 C4.1
VPP: length 7.7
  TOP w0.25: U1.38 22.37,27.52 21.32,28.57 19.89,28.57 19.14,29.32 19.14,29.86 v1(19.56,30.28)
  BOTTOM w0.25: v1(19.56,30.28) 19.05,30.28 VPP.1
N650552: length 7
  TOP w0.25: L2.1 20.35,30.42 20.35,30.41 C2.2 20.35,29.72 arc(20.54,29.27) 20.99,29.08 L3.1 23.57,29.06 U1.35
N650846: length 5.4
  TOP w0.152: 27.14,22.19 L4.1 ; L4.1 27.14,21.88 ; L4.1 27.14,21.26
  TOP w0.25: U1.21 26.5,22.63 26.61,22.52 26.61,22.34 arc(26.64,22.22) 26.71,22.11
  TOP w0.7: L4.1 27.38,21.57 arc(27.26,21.59) 27.16,21.66 26.71,22.11
N657737: length 5.5
  TOP w0.25: Y2.1 18.07,19.57 arc(18.09,19.66) 18.15,19.75 18.35,19.95 arc(18.45,20.03) 18.56,20.1 arc(18.76,20.2) 18.97,20.28 arc(19.19,20.35) 19.42,20.38 arc(20.53,20.65) 21.47,21.29 arc(21.54,21.4) 21.57,21.53 U1.11
N657743: length 4.3
  TOP w0.25: Y2.2 19.87,19.67 19.94,19.74 19.99,19.74 arc(20.09,19.81) 20.22,19.84 arc(20.52,19.9) 20.78,20.07 21.79,21.08 arc(21.92,21.28) 21.97,21.51 U1.12
N658494: length 3.8
  TOP w0.25: U1.29 27.5,25.83 28.62,26.36 28.69,26.42 arc(28.92,26.74) Y1.1
N680797: length 3.2
  TOP w0.25: 21.82,30.94 L1.1 arc(21.32,30.88) 21.31,30.81 C2.1
  TOP w0.5: ANT.1 23.17,31.5 arc(22.55,31.09) 21.82,30.94
N748992: length 3.3
  TOP w0.25: U4.2 16.94,3.71 17.42,3.23 18.94,3.23 19.02,3.31 R19.2
N749044: length 1.8
  TOP w0.25: U4.4 16.91,4.51 17.53,5.13 R20.1
N749072: length 1.9
  TOP w0.25: U4.9 13.23,3.71 R21.1
N749104: length 1.8
  TOP w0.25: CHR_LED.1 13.39,4.11 U4.8
N749108: length 4.1
  TOP w0.25: CHR_LED.2 10.88,4.62 10.7,4.44 10.7,2.43 10.95,2.18 R22.1
N749358: length 4.2
  TOP w0.3: 5.83,7.88 U5.13
  TOP w0.5: 5.83,7.88 6.6,8.66 7.15,8.66 7.65,9.16 L5.1
N749416: length 3.3
  TOP w0.3: U5.8 2.15,6.13
  TOP w0.5: 2.15,6.13 1.85,6.43 R24.1 R25.2
N749488: length 5.5
  TOP w0.3: R25.1 1.05,4.4 1.78,5.13 v1(1.78,5.13) ; U5.9 v1(2.78,7.07)
  TOP w0.5: R25.1 R23.2
  BOTTOM w0.3: v1(1.78,5.13) 1.78,6.07 v1(2.78,7.07)
N750591: length 2
  TOP w0.25: 12.75,22.78 12.77,22.75 12.77,22.64 12.78,22.63 ; 12.75,22.78 12.75,22.67 12.78,22.63 ; 12.75,22.78 U6.10 12.75,23.42 ; 12.78,22.63 C22.1
N751124: length 2.5
  TOP w0.5: SOUNDER.2 1.24,25.36 0.81,24.93 R8.1
N751136: length 2.5
  TOP w0.5: R9.1 0.81,16.28 2.13,17.6 VM-.1
N751236: length 2.3
  TOP w0.5: R8.2 1.62,23.32 1.87,23.57 Q1.3
N751248: length 2.4
  TOP w0.5: R9.2 1.4,15.32 1.7,15.62 3.04,15.62 Q2.3
N751256: length 1.4
  TOP w0.25: R12.2 0.82,22.1 1.9,22.1 Q1.1
N751260: length 1.4
  TOP w0.25: R13.2 1.93,14.12 Q2.1
  TOP w0.3: 2.1,13.93 Q2.1
N752175: length 3.7
  TOP w0.3: v1(10.67,9.19) 11.68,9.19 U3.1
  BOTTOM w0.3: C12.2 11.97,10.93 10.67,9.63 v1(10.67,9.19)
N752329: length 8.2
  BOTTOM w0.5: R15.2 13.75,16.1 12.52,17.32 Q4.3 10.09,15.58 11.2,14.46 Q3.1 11.89,14.46
N752341: length 4.1
  TOP w0.3: U3.2 12.44,10.2 v1(13.72,11.48)
  BOTTOM w0.3: v1(13.72,11.48) 13.21,10.97 C12.1
N752385: length 5.2
  TOP w0.3: v1(10.67,8.43) 11.18,7.92 12.64,7.92 12.94,8.22 U3.3
  BOTTOM w0.3: v1(10.67,8.43) 11.94,9.7 C14.2 11.97,9.66
N752391: length 3.6
  TOP w0.3: v1(13.72,10.72) 13.44,10.44 U3.4
  BOTTOM w0.3: C14.1 13.48,9.7 13.72,9.94 v1(13.72,10.72)
N752429: length 3.4
  TOP w0.3: v1(18.97,7.87) 18.75,7.65 17.82,7.65 17.44,8.02 U3.12
  BOTTOM w0.3: v1(18.97,7.87) 18.97,8.03 R18.2
N752435: length 4.1
  TOP w0.3: U3.13 17.94,10.56 v1(17.53,10.97)
  BOTTOM w0.3: v1(17.53,10.97) 17.97,10.53 17.97,10 18.27,9.7 C15.2
N752441: length 4.2
  TOP w0.3: v1(17.8,11.75) 18.44,11.11 U3.14
  BOTTOM w0.3: v1(17.8,11.75) C13.2
N753230: length 3.1
  TOP w0.25: LED.1 2.94,30.57 2.64,30.86 2.08,30.86 2.07,30.87 1.77,30.87 1.31,31.32 R10.1
N753234: length 4.6
  TOP w0.25: R11.1 1.31,29.29 2.13,28.47 4.52,28.47 4.7,28.65 4.7,29.41 LED.2
N753932: length 3.3
  TOP w0.3: v1(30.23,12.24) 30.23,10.67 30.01,10.46 29.36,10.46 U7.16
  BOTTOM w0.3: C24.2 29.72,12.75 v1(30.23,12.24)
N754493: length 3.1
  TOP w0.3: U2.3 7.11,19.17 6.65,18.72 6.65,18.45 6.63,18.43 C10.1 R14.2
N766501: length 2.1
  TOP w0.3: R14.1 8.64,16.56 PAD.1
N768010: length 5.4
  TOP w0.3: C26.2 22.35,7.38 22.84,6.89 23.71,6.89 24.26,7.44 24.26,8.56 24.66,8.96 U7.6
N788503: length 2.1
  TOP w0.25: Y1.4 27.38,26.89 26.83,26.24 26.1,26.24 26.1,26.23 U1.30
N7492626: length 4
  TOP w0.3: U5.7 2.32,4.63 2.08,4.39
  TOP w0.5: R23.1 1.71,2.37 2.08,2.74 2.08,4.39

## Copper pours and planes (outline as drawn; the poured copper is in the pictures)
GND on TOP: 27.28,3.35 28.58,3.35 28.68,3.25 28.68,1.32 27.66,0.3 25.7,0.3 25.4,0.61 25.4,1.47
GND on TOP: 4.06,2.84 3.56,2.34 2.29,2.34 1.52,1.57 1.52,0.56 1.78,0.3 6.1,0.3 6.6,0.81 6.6,2.59 6.35,2.84
GND on TOP: 28.98,21.23 28.98,22.07 28.63,22.43 28.63,23.09 28.83,23.29 30.12,23.29 30.23,23.19 30.23,21.29 30.1,21.16 29.06,21.16
GND on BOTTOM: 19.3,15.04 17.78,15.04 17.53,14.78 17.53,13.77 17.78,13.51 19.3,13.51 19.56,13.77 19.56,14.78
GND on BOTTOM: 4.06,2.84 3.81,2.59 1.78,2.59 1.27,2.08 1.27,0.81 1.78,0.3 6.1,0.3 6.43,0.64 6.43,5.82 5.84,6.4 4.06,6.4 3.81,6.15 3.81,4.37 4.06,4.11
GND on BOTTOM: 9.4,32.56 8.64,31.8 8.64,29.26 8.89,29.01 10.92,29.01 11.18,29.26 11.18,32.05 10.67,32.56
GND on BOTTOM: 30.48,29.77 30.48,14.66 30.1,14.27 20.55,14.27 13.31,21.54 10.79,21.54 10.04,22.29 10.06,26.64 11.68,28.37 11.66,32.05 12.42,32.82 21.84,32.82 22.1,32.56 22.1,30.53 22.35,30.28 29.97,30.28 ; 8 cut-outs
GND on BOTTOM: 20.32,0.3 29.87,0.3 30.48,0.91 30.48,4.75 29.51,4.75 29.51,7.92 30.48,8.86 30.48,12.75 29.72,13.51 23.11,13.51 22.35,12.75 22.35,7.42 19.81,4.88 19.81,0.81
GND on GND: 0.91,0.3 0.51,0.71 0.51,16.74 1.3,17.55 1.3,18.92 0.51,19.79 0.51,32.31 1.02,32.82 4.32,32.82 4.57,32.56 4.57,31.55 5.84,30.28 10.92,30.28 11.18,30.02 11.18,29.26 7.11,25.2 6.1,25.2 5.33,24.43 5.33,13.51 3.3,11.48 3.3,9.19 3.81,8.69 6.86,11.73 6.86,22.91 12.95,29.01 18.54,29.01 19.56,30.02 19.56,32.56 19.81,32.82 21.84,32.82 22.1,32.56 22.1,30.53 22.35,30.28 29.97,30.28 30.48,29.77 30.48,14.66 30.1,14.27 23.37,14.27 23.11,14.53 21.84,15.8 17.86,15.8 14.81,18.85 11.43,18.85 10.16,17.58 10.16,10.97 8.13,8.94 8.38,8.69 12.7,8.69 17.02,13 17.02,14.78 17.27,15.04 20.07,15.04 20.57,14.53 20.57,13.77 20.83,13.51 29.46,13.51 30.48,12.5 30.48,8.86 29.51,7.92 29.51,4.75 30.48,4.75 30.48,0.91 29.87,0.3
VBAT on TOP: 7.32,5.13 7.09,4.9 7.09,4.32 6.6,3.84 6.6,2.08 8.38,0.3 15.24,0.3 15.49,0.56 15.47,1.6 15.27,1.8 15.1,1.86 14.4,1.85 14.25,1.78 14.15,1.57 11.43,1.57 11.18,1.83 11.18,2.59 10.67,3.1 10.67,4.88 10.41,5.13
VBAT on TOP: 13.77,2.87 13.89,2.69 14.07,2.67 15.27,2.67 15.52,2.54 15.52,0.58 15.24,0.3 12.75,0.3 12.55,0.51 12.55,2.24 13.28,2.97 13.28,3.1 13.33,3.25 13.46,3.38 13.64,3.38 13.69,3.43 13.89,3.43 13.92,3.3 13.82,3.23 13.84,3.12 13.77,3
VBAT on BOTTOM: 7.32,5.13 7.04,4.85 7.04,1.65 8.38,0.3 15.24,0.3 15.49,0.56 15.49,1.32 15.24,1.57 11.43,1.57 11.18,1.83 11.18,2.59 10.67,3.1 10.67,4.88 10.41,5.13
VBAT on BOTTOM: 7.37,32.56 6.1,32.56 5.33,31.8 5.33,29.26 5.59,29.01 7.87,29.01 8.13,29.26 8.13,31.8
VBAT on POWER SOURCE: 1.02,32.82 8.38,32.82 9.91,31.29 9.91,27.74 6.86,24.69 6.86,18.59 3.81,15.54 3.81,10.97 5.33,9.45 9.14,9.45 10.16,10.46 10.16,15.24 11.85,16.93 15.76,16.88 16.05,16.59 16.05,10.77 12.19,6.91 11.18,6.91 10.67,6.4 10.67,3.1 11.18,2.59 11.18,1.83 11.45,1.56 15.24,1.58 15.49,1.32 15.49,0.56 15.24,0.3 8.64,0.3 5.84,3.1 5.84,5.13 5.33,5.64 1.78,5.64 0.51,6.91 0.51,16.74 1.3,17.55 1.3,18.92 0.51,19.79 0.51,32.31
VBUS on TOP: 16.23,3.28 16.74,3.28 17.14,2.87 18.9,2.87 19.23,2.54 19.23,0.74 18.8,0.3 17.27,0.3 16.89,0.69 16.89,1.98 16.15,2.72 16.15,3.2
VBUS on POWER SOURCE: 16.89,2.57 17.14,2.87 18.36,2.87 20.75,5.26 22.4,5.26 23.7,6.55 24.69,6.55 24.97,6.27 24.97,1.91 23.37,0.3 17.27,0.3 16.89,0.69
VCC_3V on TOP: 3.05,12.75 2.31,12.01 2.31,9.17 2.79,8.69 5.33,8.69 6.35,9.7 6.35,10.97 7.37,11.99 8.64,11.99 9.4,12.75 9.4,14.27 8.64,15.04 6.6,15.04 4.32,12.75
VCC_3V on POWER SOURCE: 4.6,15.04 4.6,11.18 5.74,10.03 8.71,10.03 9.47,10.79 9.47,15.52 13.08,19.13 16.46,19.13 18.05,17.54 18.02,9 17.2,8.18 17.2,6.78 17.86,6.12 21.97,6.12 22.91,7.06 28.3,7.06 29.62,8.38 29.62,11.79 27.53,13.87 27.53,17.04 26.87,17.5 24.56,17.5 24,18.06 24,21.29 20.73,24.51 20.73,28.78 19.89,29.64 12.55,29.64 7.67,24.77 7.67,18.14 4.72,15.19
OLED_VBAT on TOP: 13.46,7.42 13.21,7.16 13.21,6.15 13.46,5.89 14.25,5.89 14.48,6.12 14.48,7.16 14.22,7.42
OLED_VBAT on BOTTOM: 14.27,7.42 13.36,7.42 13.11,7.16 13.11,6.17 13.39,5.89 14.27,5.89 14.55,6.17 14.55,7.14
VDCDC on POWER SOURCE: 29.46,29.51 22.35,29.51 21.59,28.75 21.59,24.69 24.64,21.64 24.64,18.6 25.2,18.11 29.97,18.08 30.48,18.59 30.48,28.5 ; 1 cut-out
N650846 on TOP: 27.69,22.76 26.52,22.76 26.29,22.53 26.29,21.69 26.85,21.13 28.37,21.13 28.5,21.26 28.5,21.95

## Text on the board
Ref Des/Silkscreen Bottom: Prison God | Rev.Alpha | Designed by | ROCKEY.J
PLACE_BOUND_BOTTOM: 64*32 | 0.49
PLACE_BOUND_TOP: 3.7V | 55mAh
